# EAGLE board 5 servo control circuit (EAGLE 7.6.0)

Size 73.58 x 63.39 mm. Coordinates in mm from the lower left corner, seen from the top.
Outline: 0,0 56.82,0 56.82,53.33 0,53.33 0,0
Copper layers (1*16): Top 0.035mm / dielectric 1.5mm / Bottom 0.035mm
Design rules "default": minimum track width 10mil, minimum drill 24mil, track to track 8mil, track to pad 8mil, pad to pad 8mil, via to via 8mil, smd to smd 8mil, copper to edge 40mil, drill to drill 8mil, minimum pad ring 10mil, minimum via ring 8mil, stop-mask expansion 4mil, vias tented up to drill 0mil, thermal gap 10mil

## Footprints (pad centres in the part's own frame; a part is rotated, then mirrored left to right if it is on the bottom)
DC-POWER = drill 0.889 pad 2.54 octagon: + 0,2.54; - 0,-2.54
C5B2.5 = drill 0.813 pad 1.6 octagon: 1 -2.54,0; 2 2.54,0
B25V = drill 0.813 long: A 2.54,0.635; E -2.54,0.635; S 0,0.635
1X3P-2.54-2.54-11.6-3.0-BLACK-MALE = drill 0.889 pad 1.651 square: 1 0,2.54 | drill 0.889 pad 1.651: 2 0,0; 3 0,-2.54
ARDUINO_UNO = drill 1.016 pad 1.88: 0 63.5,50.8; 1 60.96,50.8; 2 58.42,50.8; 3 55.88,50.8; 3.3V 35.56,2.54; 4 53.34,50.8; 5 50.8,50.8; 5V 38.1,2.54; 6 48.26,50.8; 7 45.72,50.8; 8 41.656,50.8; 9 39.116,50.8; 10 36.576,50.8; 11 34.036,50.8; 12 31.496,50.8; 13 28.956,50.8; A0 50.8,2.54; A1 53.34,2.54; A2 55.88,2.54; A3 58.42,2.54; A4 60.96,2.54; A5 63.5,2.54; AREF 23.876,50.8; GND 26.416,50.8; GND. 43.18,2.54; GND.. 40.64,2.54; I/OREF 30.48,2.54; N/C 27.94,2.54; RESET 33.02,2.54; SCL 18.796,50.8; SDA 21.336,50.8; VIN 45.72,2.54 | hole 3.2: 66.04,7.62; 66.04,35.56; 15.24,50.8; 13.97,2.54
TO220 = drill 1.118 long: 1 -2.54,-6.35; 2 0,-6.35; 3 2.54,-6.35 | hole 3.302: 0,11.176

## Placement (x,y rotation side)
BAT1  [DC-POWER]  5,22.78 0 top
C1  100nF  [C5B2.5]  5,124.38 0 top  (outside the outline)
C2  100nF  [C5B2.5]  5,111.68 0 top  (outside the outline)
Rpot1  10k‎Ω  [B25V]  5,137.08 0 top  (outside the outline)
Rpot2  10k‎Ω  [B25V]  5,149.78 0 top  (outside the outline)
Rpot3  10k‎Ω  [B25V]  5,162.48 0 top  (outside the outline)
Rpot4  10k‎Ω  [B25V]  5,175.18 0 top  (outside the outline)
Rpot5  10k‎Ω  [B25V]  5,187.88 0 top  (outside the outline)
SERVO1  [1X3P-2.54-2.54-11.6-3.0-BLACK-MALE]  5,60.88 0 top
SERVO2  [1X3P-2.54-2.54-11.6-3.0-BLACK-MALE]  5,48.18 0 top
SERVO3  [1X3P-2.54-2.54-11.6-3.0-BLACK-MALE]  5,73.58 0 top  (outside the outline)
SERVO4  [1X3P-2.54-2.54-11.6-3.0-BLACK-MALE]  5,86.28 0 top  (outside the outline)
SERVO5  [1X3P-2.54-2.54-11.6-3.0-BLACK-MALE]  5,98.98 0 top  (outside the outline)
U1  [ARDUINO_UNO]  5,10.08 0 top
U2  [TO220]  5,35.48 0 top

## Library data of the parts
BAT1 C1 C2 Rpot1-Rpot5 SERVO1-SERVO5 U1 U2 = AUTODESK_CIRCUITS_BREADBOARD

## Nets
N$1: BAT1.+ C1.2 U2.1
N$2: C2.1 Rpot1.A Rpot2.A Rpot3.A Rpot4.A Rpot5.A SERVO1.2 SERVO2.2 SERVO3.2 SERVO4.2 SERVO5.2 U1.VIN U2.3
N$3: BAT1.- C1.1 C2.2 Rpot1.E Rpot2.E Rpot3.E Rpot4.E Rpot5.E SERVO1.1 SERVO2.1 SERVO3.1 SERVO4.1 SERVO5.1 U1.GND. U2.2
N$4: SERVO3.3 U1.11
N$5: SERVO5.3 U1.10
N$6: SERVO2.3 U1.9
N$7: SERVO1.3 U1.6
N$8: SERVO4.3 U1.5
N$9: Rpot5.S U1.A5
N$10: Rpot4.S U1.A4
N$11: Rpot3.S U1.A3
N$12: Rpot2.S U1.A2
N$13: Rpot1.S U1.A1

## Tracks (layer width: path | path; a pad name or v marks a point on that pad's centre or on a via)
N$1  (2 unrouted)
N$2  (12 unrouted)
N$3  (14 unrouted)
N$4  (1 unrouted)
N$5  (1 unrouted)
N$6  (1 unrouted)
N$7  (1 unrouted)
N$8  (1 unrouted)
N$9  (1 unrouted)
N$10  (1 unrouted)
N$11  (1 unrouted)
N$12  (1 unrouted)
N$13  (1 unrouted)